# Altium PCB IO_Boardv2_301115.PcbDoc
Units mil, origin at the board's own origin, x right, y up, seen from the top; angles counter-clockwise.
Board outline 6889.76 x 3740.16 mil, 2 copper layers (Top Layer, Bottom Layer); 139 components, 104 nets, 581 pads, 46 vias.
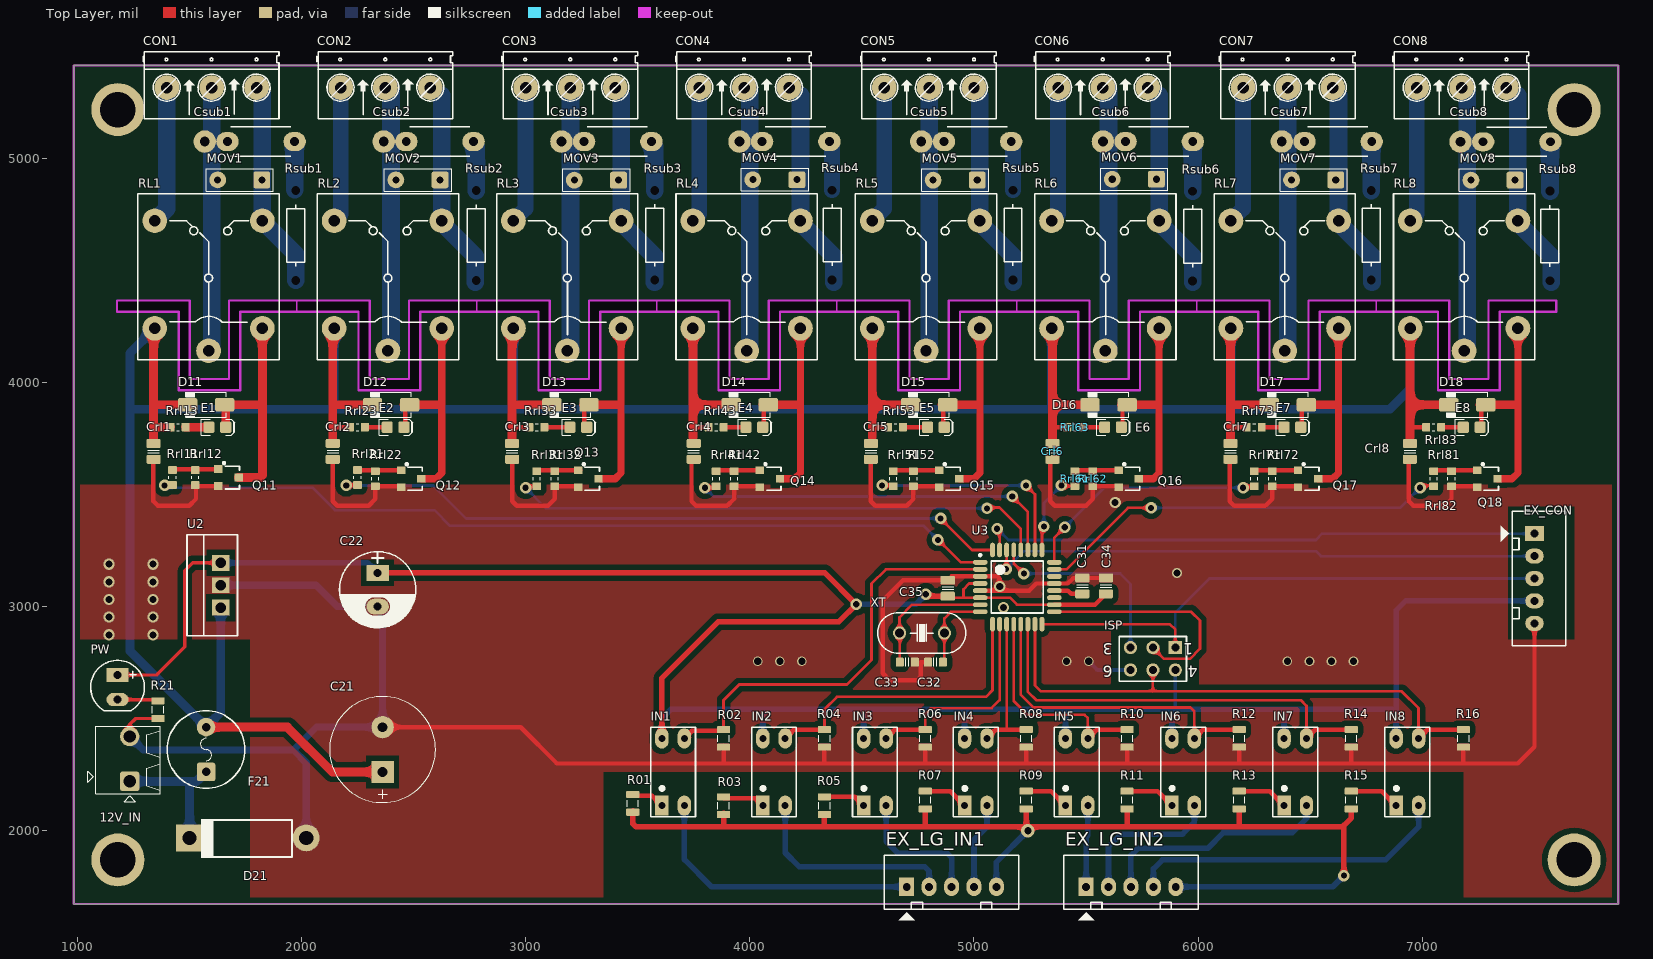
[diagram p0: Top Layer view]
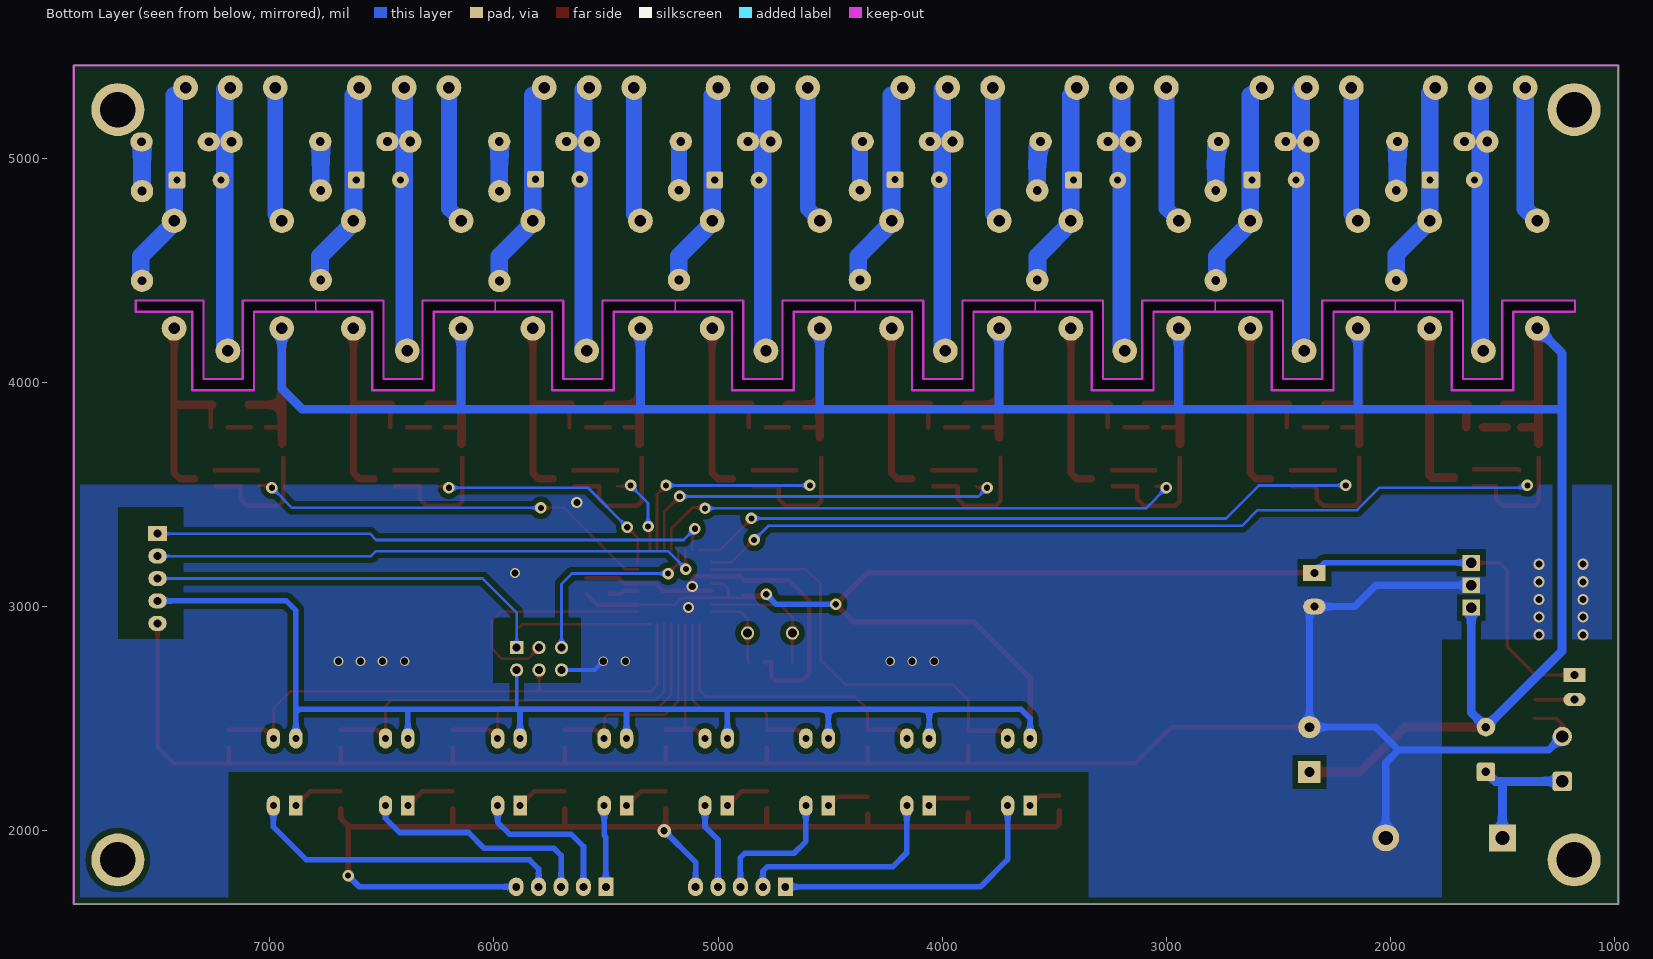
[diagram p1: Bottom Layer view, seen from below]
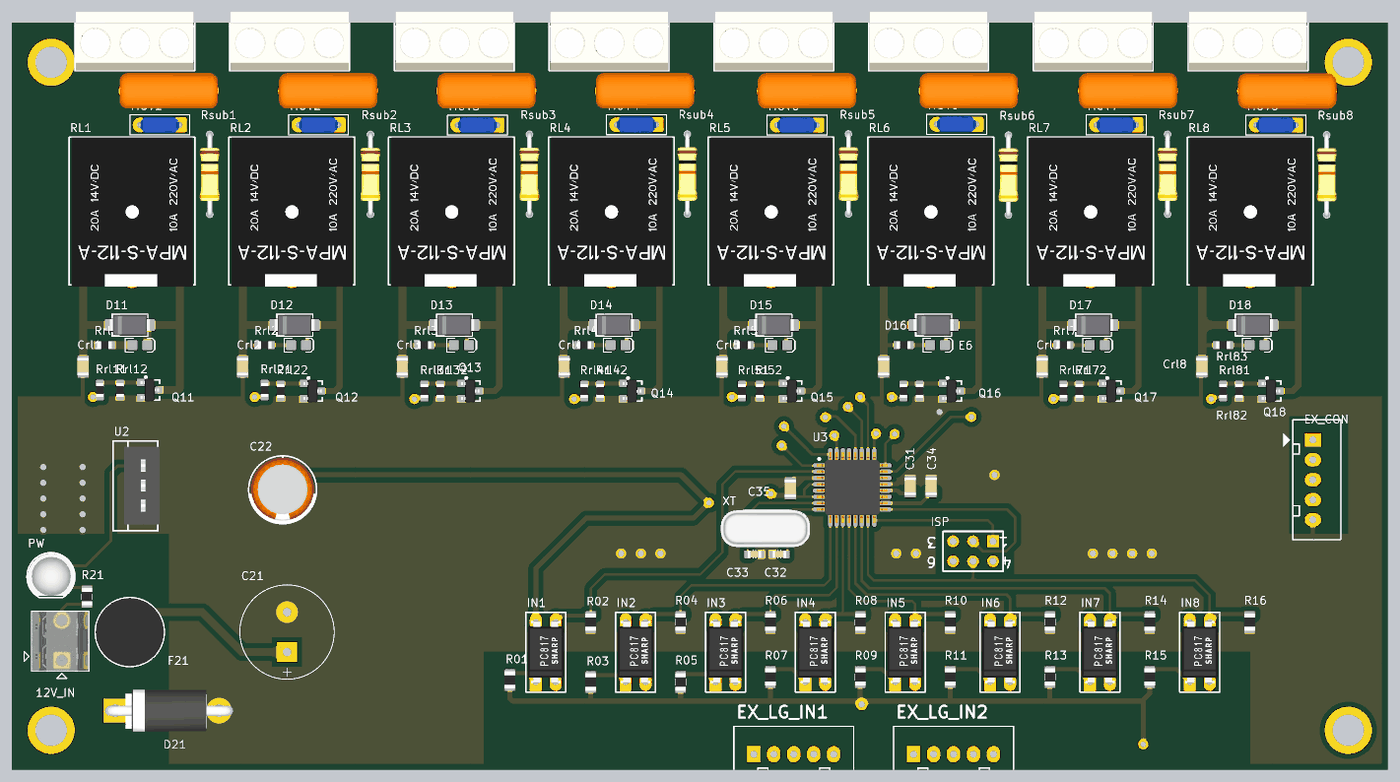
[diagram p2: 3D render of the assembled board from above, using the file's embedded part models]

## Layer stack, top to bottom
Top Solder: solder mask 0.4, Solder Resist, Dk 3.5
Top Layer: signal copper 1.4
Dielectric 1: dielectric 12.6, FR-4, Dk 4.8
Bottom Layer: signal copper 1.4
Bottom Solder: solder mask 0.4, Solder Resist, Dk 3.5

## Board outline
984.25,1673.23 7874.02,1673.23 7874.02,5413.39 984.25,5413.39
cut-out: 6795,4315 7070,4315 7070,3965 7345,3965 7345,4315 7597.5,4315 7597.5,4365 7295,4365 7295,4015 7120,4015 7120,4365 6795,4365
cut-out: 5992.5,4315 6267.5,4315 6267.5,3965 6542.5,3965 6542.5,4315 6795,4315 6795,4365 6492.5,4365 6492.5,4015 6317.5,4015 6317.5,4365 5992.5,4365
cut-out: 5190,4315 5465,4315 5465,3965 5740,3965 5740,4315 5992.5,4315 5992.5,4365 5690,4365 5690,4015 5515,4015 5515,4365 5190,4365
cut-out: 4387.5,4315 4662.5,4315 4662.5,3965 4937.5,3965 4937.5,4315 5190,4315 5190,4365 4887.5,4365 4887.5,4015 4712.5,4015 4712.5,4365 4387.5,4365
cut-out: 3585,4315 3860,4315 3860,3965 4135,3965 4135,4315 4387.5,4315 4387.5,4365 4085,4365 4085,4015 3910,4015 3910,4365 3585,4365
cut-out: 2782.5,4315 3057.5,4315 3057.5,3965 3332.5,3965 3332.5,4315 3585,4315 3585,4365 3282.5,4365 3282.5,4015 3107.5,4015 3107.5,4365 2782.5,4365
cut-out: 1980,4315 2255,4315 2255,3965 2530,3965 2530,4315 2782.5,4315 2782.5,4365 2480,4365 2480,4015 2305,4015 2305,4365 1980,4365
cut-out: 1177.5,4315 1452.5,4315 1452.5,3965 1727.5,3965 1727.5,4315 1980,4315 1980,4365 1677.5,4365 1677.5,4015 1502.5,4015 1502.5,4365 1177.5,4365

## Design rules (kind name [scope] priority, off if disabled: settings)
Clearance [All] p1: gap=25
PlaneConnect [All] p1: planeconnectstyle=Direct reliefexpansion=20 reliefentries=4 reliefconductorwidth=25 reliefairgap=10
PolygonConnect [All] p1: connectstyle=Direct reliefconductorwidth=25 reliefentries=4 polygonreliefangle="90 Angle" airgapwidth=10
RoutingVias [All] p1: holewidth=28 width=50 viastyle="Through Hole" minholewidth=23.62 minwidth=47.24 maxholewidth=196.85 maxwidth=196.85
SolderMaskExpansion [All] p1: expansion=4
Width [All] p1: maxlimit=118.11 minlimit=10 preferedwidth=10
29 further rules are at their usual default settings.

## Components (designator, comment, footprint, x,y, rotation, side; value= is the part's Value field where it differs from the comment)
12V_IN "Stackable ScrewTerm" 2P_PCB_ScrewTerm_200mil 1082.68,2165.35 r0 top
C21 "2200uF/35V" CP_1000uF_25V 2362.2,2362.2 r90 top
C22 "330uF/25V" CP1.5/3.4 2340,3150 r270 top
C31 "Cap" CAPC2012N_F 5483,3092 r90 top
C32 "CAP NP" CAPC1608N 4828,2752 r180 top
C33 "CAP NP" CAPC1608N 4703,2752 r0 top
C34 "Cap" CAPC2012N_F 5588,3092 r90 top
C35 "Cap" CAPC2012N_F 4883,3082 r90 top
CON1 "3P_ScrewTerm_200mil" 3P_ScrewTerm_200mil 1300,5175 r0 top
CON2 "3P_ScrewTerm_200mil" 3P_ScrewTerm_200mil 2075,5175 r0 top
CON3 "3P_ScrewTerm_200mil" 3P_ScrewTerm_200mil 2900,5175 r0 top
CON4 "3P_ScrewTerm_200mil" 3P_ScrewTerm_200mil 3675,5175 r0 top
CON5 "3P_ScrewTerm_200mil" 3P_ScrewTerm_200mil 4500,5175 r0 top
CON6 "3P_ScrewTerm_200mil" 3P_ScrewTerm_200mil 5275,5175 r0 top
CON7 "3P_ScrewTerm_200mil" 3P_ScrewTerm_200mil 6100,5175 r0 top
CON8 "3P_ScrewTerm_200mil" 3P_ScrewTerm_200mil 6875,5175 r0 top
Crl1 "CAP NP" CAPC2012N_F 1341,3692 r270 top
Crl2 "CAP NP" CAPC2012N_F 2140,3692 r270 top
Crl3 "CAP NP" CAPC2012N_F 2940,3692 r270 top
Crl4 "CAP NP" CAPC2012N_F 3750,3692 r270 top
Crl5 "CAP NP" CAPC2012N_F 4540,3692 r270 top
Crl6 "CAP NP" CAPC2012N_F 5350,3692 r270 top
Crl7 "CAP NP" CAPC2012N_F 6144,3692 r270 top
Crl8 "CAP NP" CAPC2012N_F 6944,3692 r270 top
Csub1 "CAP NP" CAPMF12.5x4.5x9.0x10mmLS 1820,5074 r180 top
Csub2 "CAP NP" CAPMF12.5x4.5x9.0x10mmLS 2618,5074 r180 top
Csub3 "CAP NP" CAPMF12.5x4.5x9.0x10mmLS 3411,5074 r180 top
Csub4 "CAP NP" CAPMF12.5x4.5x9.0x10mmLS 4205,5074 r180 top
Csub5 "CAP NP" CAPMF12.5x4.5x9.0x10mmLS 5016,5074 r180 top
Csub6 "CAP NP" CAPMF12.5x4.5x9.0x10mmLS 5826,5074 r180 top
Csub7 "CAP NP" CAPMF12.5x4.5x9.0x10mmLS 6624,5074 r180 top
Csub8 "CAP NP" CAPMF12.5x4.5x9.0x10mmLS 7421,5073 r180 top
D11 "Diode" DO-214AC 1575,3900 r180 top
D12 "Diode" DO-214AC 2400,3900 r180 top
D13 "Diode" DO-214AC 3200,3900 r180 top
D14 "Diode" DO-214AC 4000,3900 r180 top
D15 "Diode" DO-214AC 4800,3900 r180 top
D16 "Diode" DO-214AC 5600,3900 r180 top
D17 "Diode" DO-214AC 6400,3900 r180 top
D18 "Diode" DO-214AC 7200,3900 r180 top
D21 "Diode" "Diode 3A" 1771.65,1968.5 r180 top
E1 "Blue" LED-0805-A 1625,3800 r0 top
E2 "Blue" LED-0805-A 2420,3800 r0 top
E3 "Blue" LED-0805-A 3235,3800 r0 top
E4 "Blue" LED-0805-A 4020,3800 r0 top
E5 "Blue" LED-0805-A 4830,3800 r0 top
E6 "Blue" LED-0805-A 5620,3800 r0 top
E7 "Blue" LED-0805-A 6420,3800 r0 top
E8 "Blue" LED-0805-A 7220,3800 r0 top
EX_CON "JP5" CON5 7500,3325 r270 top
EX_LG_IN1 "JP5" CON5 4700,1750 r0 top
EX_LG_IN2 "JP5" CON5 5500,1750 r0 top
F21 "1.5A" FUSE_SR-5-BK 1574.8,2362.2 r90 top
IN1 "PC817" DIP4/W0.3 3608,2112 r0 top
IN2 "PC817" DIP4/W0.3 4058,2112 r0 top
IN3 "PC817" DIP4/W0.3 4508,2112 r0 top
IN4 "PC817" DIP4/W0.3 4958,2112 r0 top
IN5 "PC817" DIP4/W0.3 5408,2112 r0 top
IN6 "PC817" DIP4/W0.3 5883,2112 r0 top
IN7 "PC817" DIP4/W0.3 6383,2112 r0 top
IN8 "PC817" DIP4/W0.3 6883,2112 r0 top
ISP "Header 3X2A" HDR2X3_CEN 5898,2817 r180 top
MOV1 "CAP NP" CAPC500P450250X550 1725,4903 r180 top
MOV2 "CAP NP" CAPC500P450250X550 2520,4903 r180 top
MOV3 "CAP NP" CAPC500P450250X550 3316,4902 r180 top
MOV4 "CAP NP" CAPC500P450250X550 4112,4904 r180 top
MOV5 "CAP NP" CAPC500P450250X550 4916,4902 r180 top
MOV6 "CAP NP" CAPC500P450250X550 5715,4906 r180 top
MOV7 "CAP NP" CAPC500P450250X550 6515,4903 r180 top
MOV8 "CAP NP" CAPC500P450250X550 7315,4902 r180 top
PW "Led" "LED 5mm RED" 1180,2640 r270 top
Q11 "C828" "SOT23 TOP" 1675,3575 r270 top
Q12 "C828" "SOT23 TOP" 2490,3570 r270 top
Q13 "C828" "SOT23 TOP" 3280,3570 r270 top
Q14 "C828" "SOT23 TOP" 4090,3570 r270 top
Q15 "C828" "SOT23 TOP" 4890,3570 r270 top
Q16 "C828" "SOT23 TOP" 5690,3570 r270 top
Q17 "C828" "SOT23 TOP" 6490,3570 r270 top
Q18 "C828" "SOT23 TOP" 7290,3570 r270 top
R01 "Res" RESC2012N_F 3478,2122 r270 top
R02 "Res" RESC2012N_F 3883,2412 r90 top
R03 "Res" RESC2012N_F 3883,2112 r270 top
R04 "Res" RESC2012N_F 4333,2412 r90 top
R05 "Res" RESC2012N_F 4333,2112 r270 top
R06 "Res" RESC2012N_F 4783,2412 r90 top
R07 "Res" RESC2012N_F 4783,2137 r270 top
R08 "Res" RESC2012N_F 5233,2412 r90 top
R09 "Res" RESC2012N_F 5233,2137 r270 top
R10 "Res" RESC2012N_F 5683,2412 r90 top
R11 "Res" RESC2012N_F 5683,2137 r270 top
R12 "Res" RESC2012N_F 6183,2412 r90 top
R13 "Res" RESC2012N_F 6183,2137 r270 top
R14 "Res" RESC2012N_F 6683,2412 r90 top
R15 "Res" RESC2012N_F 6683,2137 r270 top
R16 "Res" RESC2012N_F 7183,2412 r90 top
R21 "Res_0805_1k" RESC2012N_F 1360,2540 r270 top
RL1 "Relay 10A/5V" RL_5PIN 1900,4100 r90 top
RL2 "Relay 10A/5V" RL_5PIN 2700,4100 r90 top
RL3 "Relay 10A/5V" RL_5PIN 3500,4100 r90 top
RL4 "Relay 10A/5V" RL_5PIN 4300,4100 r90 top
RL5 "Relay 10A/5V" RL_5PIN 5100,4100 r90 top
RL6 "Relay 10A/5V" RL_5PIN 5900,4100 r90 top
RL7 "Relay 10A/5V" RL_5PIN 6700,4100 r90 top
RL8 "Relay 10A/5V" RL_5PIN 7500,4100 r90 top
Rl52 "Res" RESC1608N_ZERO 4730,3570 r90 top
Rrl11 "Res" RESC1608N_ZERO 1425,3575 r90 top
Rrl12 "Res" RESC1608N_ZERO 1526.38,3575 r90 top
Rrl13 "Res" RESC1608N_ZERO 1450,3800 r180 top
Rrl21 "Res" RESC1608N_ZERO 2250,3575 r90 top
Rrl22 "Res" RESC1608N_ZERO 2330,3570 r90 top
Rrl23 "Res" RESC1608N_ZERO 2250,3800 r180 top
Rrl31 "Res" RESC1608N_ZERO 3050,3570 r90 top
Rrl32 "Res" RESC1608N_ZERO 3130,3570 r90 top
Rrl33 "Res" RESC1608N_ZERO 3050,3800 r180 top
Rrl41 "Res" RESC1608N_ZERO 3850,3570 r90 top
Rrl42 "Res" RESC1608N_ZERO 3930,3570 r90 top
Rrl43 "Res" RESC1608N_ZERO 3850,3800 r180 top
Rrl51 "Res" RESC1608N_ZERO 4640,3570 r90 top
Rrl53 "Res" RESC1608N_ZERO 4650,3800 r180 top
Rrl61 "Res" RESC1608N_ZERO 5450,3570 r90 top
Rrl62 "Res" RESC1608N_ZERO 5530,3570 r90 top
Rrl63 "Res" RESC1608N_ZERO 5450,3800 r180 top
Rrl71 "Res" RESC1608N_ZERO 6250,3570 r90 top
Rrl72 "Res" RESC1608N_ZERO 6330,3570 r90 top
Rrl73 "Res" RESC1608N_ZERO 6250,3800 r180 top
Rrl81 "Res" RESC1608N_ZERO 7050,3570 r90 top
Rrl82 "Res" RESC1608N_ZERO 7130,3570 r90 top
Rrl83 "Res" RESC1608N_ZERO 7050,3800 r180 top
Rsub1 "Res" RESTH_AXIAL-0.4 1975,4655 r270 top
Rsub2 "Res" RESTH_AXIAL-0.4 2780,4655 r270 top
Rsub3 "Res" RESTH_AXIAL-0.4 3576,4656 r270 top
Rsub4 "Res" RESTH_AXIAL-0.4 4367,4657 r270 top
Rsub5 "Res" RESTH_AXIAL-0.4 5174,4657 r270 top
Rsub6 "Res" RESTH_AXIAL-0.4 5975,4652 r270 top
Rsub7 "Res" RESTH_AXIAL-0.4 6772,4656 r270 top
Rsub8 "Res" RESTH_AXIAL-0.4 7569,4653 r270 top
U2 "LM7805" TO-220 1640,3095 r90 top
U3 "ATmega88PA" 32PIN 5193,3087 r0 top
XT "20MHz" XT2 4768,2882 r0 top

## Footprints (in the part's own frame and the unit in brackets; to place one, negate y for a bottom-side part, rotate by r counter-clockwise, add the part's x,y. Pads: shape width x height; smd on the part's side, far side on the other; paste and mask are expansions set on the pad)
2P_PCB_ScrewTerm_200mil [mm]
  rrect25% 2.2x2.2 hole 1.4: 1(3.85,1.397)
  round 2.2 hole 1.4: 2(3.85,6.477)
  silkscreen extent -0.93,-0.89 7.3,7.66, body extent 0,0 7.3,7.62, height 8.5
3P_ScrewTerm_200mil [mil]
  round 110 hole 51.18: 1(100,140) 2(300,140) 3(500,140)
  silkscreen extent -6,0 600,300, body extent 5,0 595,295, height 394
32PIN [mm]
  oval 1.65x0.55 smd: 1(-4.2,2.8) 2(-4.2,2) 3(-4.2,1.2) 4(-4.2,0.4) 5(-4.2,-0.4) 6(-4.2,-1.2) 7(-4.2,-2) 8(-4.2,-2.8) 17(4.2,-2.8) 18(4.2,-2) 19(4.2,-1.2) 20(4.2,-0.4) 21(4.2,0.4) 22(4.2,1.2) 23(4.2,2) 24(4.2,2.8)
  oval 0.55x1.65 smd: 9(-2.8,-4.2) 10(-2,-4.2) 11(-1.2,-4.2) 12(-0.4,-4.2) 13(0.4,-4.2) 14(1.2,-4.2) 15(2,-4.2) 16(2.8,-4.2) 25(2.8,4.2) 26(2,4.2) 27(1.2,4.2) 28(0.4,4.2) 29(-0.4,4.2) 30(-1.2,4.2) 31(-2,4.2) 32(-2.8,4.2)
  silkscreen extent -4.32,-2.95 2.95,3.75, body extent -4.5,-4.5 4.5,4.5, height 1.6
CAPC500P450250X550 [mm] "TDK FK24 radial ceramic capacitor"
  round 0.508 on Mech14: 0(0,0)
  rrect25% 1.905x1.905 hole 0.8: 1(-2.5,0)
  round 1.905 hole 0.8: 2(2.5,0)
  silkscreen extent -3.81,-1.27 3.81,1.27, body extent -2.8,-1 2.8,1, height 5.47
CAPC1608N [mm] "Chip Capacitor, Body 1.6x0.8mm, 0603, IPC Medium Density"
  round 0.254 on Mech14: 0(0,0)
  rrect25% 0.9x1 smd: 1(-0.85,0) 2(0.85,0)
  Top Layer pour cut-out: -0.4,0.6 0.4,0.6 0.4,-0.6 -0.4,-0.6
  silkscreen extent -0.18,-0.48 0.18,0.48, body extent -0.85,-0.45 0.85,0.45, height 0.89
CAPC2012N_F [mm] "Chip Capacitor, Body 2.0x1.2mm, 0805, IPC Medium Density, for Flex circuits"
  round 0.254 on Mech14: 0(0,0)
  rrect25% 1.2x1.4 on Top Solder: 1(-0.9,0) 1(0.9,0)
  rrect25% 1x1.6 smd paste-1: 1(-0.9,0) 2(0.9,0)
  rrect25% 1x1.4 on Top Paste: 1(-0.9,0) 1(0.9,0)
  Top Layer pour cut-out: -0.4,0.8 0.4,0.8 0.4,-0.8 -0.4,-0.8
  silkscreen extent -0.15,-0.65 0.15,0.65, body extent -1.1,-0.72 1.1,0.73, height 1.34
CAPMF12.5x4.5x9.0x10mmLS [mil] "Capacitor, MF, Thru-Hole, Dipped Radial; Body 12.5 x 4.5 x 9.0 mm (WxTxH) Pin Spacing 10.0 mm (typ)"
  oval 100x85 hole 39.37: 1(-150,0) 2(150,0)
  round 100 hole 43.31: 2(251,0)
  silkscreen extent -133,-65 135,65, body extent -196,-89 296,89, height 354
CON5 [mm] "CON5"
  rect 1.7x2.1 hole 0.9: 1(0,0)
  oval 1.7x2.1 hole 0.9: 2(2.54,0) 3(5.08,0) 4(7.62,0) 5(10.16,0)
  silkscreen extent -2.54,-3.8 12.7,3.56
CP1.5/3.4 [mil] "Tu hoa 220->470uF,16V, 470uF/16V,25V"
  rect 70x100 hole 35.43: 1(0,0)
  oval 70x100 hole 35.43: 2(150,0)
  silkscreen extent -95,-170 245,170, body extent -85,-157 230,157, height 446
CP_1000uF_25V [mm]
  rect 2.54x2.54 hole 1.1: 1(-2.54,0)
  round 2.54 hole 1.1: 2(2.54,0)
  silkscreen extent -6,-6 6,6, body extent -6,-6 6.02,6, height 20.1
"Diode 3A" [mil] "Diode Schottky 1N5822"
  round 120 hole 62.99: 1(-250,0)
  rect 120x120 hole 62.99: 2(270,0)
  silkscreen extent -186,-85 219,90, body extent -321,-104 321,104, height 248
DIP4/W0.3 [mil] "PC817"
  rect 60x90 hole 31.5: 1(0,0)
  oval 60x90 hole 31.5: 2(100,0) 3(100,300) 4(0,300)
  silkscreen extent -50,-50 150,350, body extent -40,-5 140,305, height 169
DO-214AC [mm] "JEDEC DO214 variation AC. SMA"
  round 0.508 on Mech14: 0(0,0)
  rrect25% 2.2x1.5 smd: A(-2.1,0) K(2.1,0)
  silkscreen extent -2.3,-1.4 2.3,1.4, body extent -2.6,-1.3 2.6,1.3, height 2.42
FUSE_SR-5-BK [mm]
  round 0.5 on Mech14: 0(0,0)
  rrect25% 2.1x2.1 hole 0.965: 1(-2.54,0)
  round 2.1 hole 0.965: 2(2.54,0)
  silkscreen extent -4.4,-4.4 4.4,4.4, body extent -4.35,-4.32 4.35,4.32, height 8.29
HDR2X3_CEN [mm] "Connector; Header; 3x2 Position"
  rect 1.5x1.5 hole 0.9: 1(0,0)
  round 1.5 hole 0.9: 2(2.54,0) 3(5.08,0) 4(0,2.54) 5(2.54,2.54) 6(5.08,2.54)
  silkscreen extent -1.27,-1.27 6.35,3.81
"LED 5mm RED" [mm]
  rect 1.6x2.5 hole 0.9: A(-1.397,0)
  oval 1.5x2.5 hole 0.9: K(1.397,0)
  silkscreen extent -3.04,-3.05 2.64,3.04, body extent -2.94,-2.97 2.48,3.05, height 12.31
LED-0805-A [mil]
  round 20 on Mech14: 0(0,0)
  rrect25% 50x50 smd: A(-37.5,0) K(37.5,0)
  Top Layer pour cut-out: -15,30 15,30 15,-30 -15,-30
  silkscreen extent -72,-35 77,35, body extent -39,-25 39,25, height 31
RESC1608N_ZERO [mm] "Chip Resistor, Body 1.6x0.8mm, 0603, IPC Medium Density"
  round 0.254 on Mech14: 0(0,0)
  rrect25% 0.9x1 smd: 1(-0.85,0) 2(0.85,0)
  Top Layer pour cut-out: -0.4,0.6 0.4,0.6 0.4,-0.6 -0.4,-0.6
  silkscreen extent -0.15,-0.41 0.15,0.41, body extent -0.87,-0.47 0.88,0.48, height 0.54
RESC2012N_F [mm] "Chip Resistor, Body 2.0x1.2mm, 0805, IPC Medium Density"
  round 0.254 on Mech14: 0(0,0)
  rrect25% 1x1.3 on Top Solder: 1(-1,0) 1(1,0)
  rrect25% 0.8x1.5 smd paste-1: 1(-1,0) 2(1,0)
  rrect25% 0.8x1.3 on Top Paste: 1(-1,0) 1(1,0)
  Top Layer pour cut-out: -0.6,0.75 0.6,0.75 0.6,-0.75 -0.6,-0.75
  silkscreen extent -0.38,-0.64 0.38,0.64, body extent -1.1,-0.67 1.1,0.68, height 0.69
RESTH_AXIAL-0.4 [mm]
  round 0 / inner round 0 / far side round 2.54 hole 1 unplated: 1(-5.08,0) 2(5.08,0)
  silkscreen extent -3.5,-1.02 3.5,1.02, body extent -5.38,-1.28 5.38,1.28, height 2.6
RL_5PIN [mm]
  round 2.8 hole 1.3: 1(1.041,7.976) 2(15.773,14.072) 3(15.773,1.88) 4(3.581,1.88) 5(3.581,14.072)
  silkscreen extent 0.03,-0.03 18.82,15.98, body extent -0.18,0.2 18.82,15.7, height 15.5
"SOT23 TOP" [mm]
  rect 0.9x0.95 smd: 1(-0.965,-1.143) 2(0,1.143) 3(0.965,-1.143)
  silkscreen extent -1.77,-0.63 1.3,1.25, body extent -1.46,-1.17 1.46,1.17, height 1
TO-220 [mm]
  rect 1.8x2 hole 1.2: 1(-2.54,0) 2(0,0) 3(2.54,0)
  silkscreen extent -5.71,-1.91 5.71,3.81, body extent -4.92,-2.13 4.98,2.37, height 8.08
XT2 [mm]
  round 1.5 hole 1: 1(-2.54,0) 2(2.54,0)
  silkscreen extent -5.03,-2.29 4.96,2.29, body extent -5.93,-2.36 5.42,2.29, height 3.5

## Part data
12V_IN: library part 2P_ScrewTerm_90S_3.81MM, "Terminal Block Screw Type THT 2-Position 3.81mm pitch"
C21 C22: library part CP4, "Cap 1000uF/16V - 220uF/50V"
E1 E2 E3 E4 E5 E6 E7 E8: library part LED_SMD_Blue_0805_100mcd, "LED 0805 SMD Blue 100mcd 470nm"
EX_CON EX_LG_IN1 EX_LG_IN2: library part Con5, "Connector 5"
F21: library part Fuse
IN1 IN2 IN3 IN4 IN5 IN6 IN7 IN8: library part Opto
ISP: "Header, 3-Pin, Dual row"
Q11 Q12 Q13 Q14 Q15 Q16 Q17 Q18: library part NPN, "Transistor C828 C1815...."
R21: library part Res
RL1 RL2 RL3 RL4 RL5 RL6 RL7 RL8: library part "Relay 1", "Relay SPDT,10A - 12VDC 5 Pin"
U2: library part LM78xx
U3: library part ATmega48/168/328, "ATmega48/168/328"
XT: library part Crystal

## Free pads (board coordinates)
  round 236.22 hole 157.48: 0(7677.17,5216.54) 1(7677.17,1870.08) 2(1181.1,5216.54) 3(1181.1,1870.08)

## Via types
v1: diameter 51.18, hole 27.56, Top Layer to Bottom Layer, 22 vias
v2: diameter 50, hole 31.5, Top Layer to Bottom Layer, tented both sides, 13 vias
v3: diameter 43.31, hole 31.5, Top Layer to Bottom Layer, 10 vias
v4: diameter 59.06, hole 31.5, Top Layer to Bottom Layer, 1 vias

## Nets (pads, with @x,y where several pads share a name; then routed paths per layer and width w, separated by ;. In a path a pad name is that pad's centre, name@x,y a point inside that pad or via, vN(x,y) a via of type N, cw(c..) or ccw(c..) an arc to the next point about the centre after c; other vN are vias at no path point)
+12_EX: EX_LG_IN1.5 EX_LG_IN2.5 R01.2 R03.2 R05.2 R07.2 R09.2 R11.2 R13.2 R15.2 | length 5053.3
  Top Layer w25: R01.2@3478,2088.54 3478,2032 3492.96,2017.04 4338,2017.04 ; 3883,2022.04 R03.2@3883,2078.54 ; R05.2 4333,2022.04 4338,2017.04 ; R07.2 4783,2022.04 4788,2017.04 ; v4@5228,2017.04 4788,2017.04 ; v4@5233,2022.04 R09.2 ; v4@5240,2017.04 5678,2017.04 ; R11.2 5683,2022.04 5678,2017.04 ; R13.2 6183,2022.04 6188,2017.04 ; v1(6650,1800) 6650,2024 ; R15.2 6683,2057 6650,2024 ; 4338,2017.04 4788,2017.04 ; 5678,2017.04 6188,2017.04 ; 6188,2017.04 6643.04,2017.04 6650,2024
  Bottom Layer w25: EX_LG_IN1.5 5100,1860 v4(5240,2000) ; EX_LG_IN2.5 6600,1750 v1(6650,1800)
+12V: C21.1 Crl1.1@1341,3727.43 Crl2.1@2140,3727.43 Crl3.1@2940,3727.43 Crl4.1@3750,3727.43 Crl5.1@4540,3727.43 Crl6.1@5350,3727.43 Crl7.1@6144,3727.43 Crl8.1@6944,3727.43 D11.K D12.K D13.K D14.K D15.K D16.K D17.K D18.K F21.2 RL1.5 RL2.5 RL3.5 RL4.5 RL5.5 RL6.5 RL7.5 RL8.5 Rrl13.2 Rrl23.2 Rrl33.2 Rrl43.2 Rrl53.2 Rrl63.2 Rrl73.2 Rrl83.2 U2.1 | length 17851.6
  Top Layer w19.68: 2146,3800 Rrl23.2 ; 2946,3800 Rrl33.2 ; 3746,3800 Rrl43.2 ; 4546,3800 Rrl53.2 ; 5350,3800 Rrl63.2 ; 6146,3800 Rrl73.2 ; 6946,3800 Rrl83.2
  Top Layer w39.37: Crl1.1@1341,3727.43 1341,4236 RL1.5 ; 1346,3800 Rrl13.2 ; 1346,3900 D11.K ; F21.2 1937.8,2462.2 2137.8,2262.2 C21.1 ; Crl2.1@2140,3727.43 2140,4235 RL2.5 ; 2146,3900 D12.K@2292.32,3900 ; Crl3.1@2940,3727.43 2940,4235 RL3.5 ; 2946,3900 D13.K@3092.32,3900 ; 3746,3756 3746,3800 3746,3900 ; RL4.5 3746,3900 ; D14.K@3892.32,3900 3746,3900 ; 4546,3756 4546,3800 4546,3900 ; RL5.5 4546,3900 ; D15.K@4692.32,3900 4546,3900 ; RL6.5 5350,4237 5350,3900 ; Crl6.1@5350,3727.43 5350,3800 5350,3900 ; D16.K@5492.32,3900 5350,3900 ; Crl7.1@6144,3727.43 6144,4239 RL7.5 ; 6146,3900 D17.K@6292.32,3900 ; Crl8.1@6944,3727.43 RL8.5@6944,4239 ; 6946,3756 6946,3800 6946,3900 ; RL8.5 6946,3900 ; D18.K@7092.32,3900 6946,3900
  Bottom Layer w39.37: RL1.5 1235,4130 1235,3880 ; U2.1 1640,2527.4 F21.2 1235,2802.01 1235,3880 ; RL2.5 2146,3884 2150,3880 ; RL3.5 2946,3881 2945,3880 ; RL4.5 3746,3884 3750,3880 ; RL5.5 4546,3881 4545,3880 ; RL6.5 5346,3881 5347,3880 ; 6146,3884 RL7.5 ; RL8.5 6946,3971 6855,3880 5347,3880 ; 1235,3880 2150,3880 ; 2150,3880 2945,3880 ; 2945,3880 3750,3880 ; 3750,3880 4545,3880 ; 4545,3880 5347,3880
ADC6: U3.19
ADC7: U3.22
AREF: C31.1@5483,3056.57 U3.20 | length 130.7
  Top Layer w19.68: U3.20 5418.75,3071.25 5433.43,3056.57 C31.1@5483,3056.57
EX_IN_1: EX_LG_IN1.1 IN1.2 | length 1282.5
  Bottom Layer w25: IN1.2 3708,1872 3830,1750 EX_LG_IN1.1
EX_IN_2: EX_LG_IN1.2 IN2.2 | length 956
  Bottom Layer w25: IN2.2 4158,1902 4220,1840 4780,1840 4800,1820 EX_LG_IN1.2
EX_IN_3: EX_LG_IN1.3 IN3.2 | length 611.8
  Bottom Layer w25: IN3.2 4608,1952 4660,1900 4880,1900 4900,1880 EX_LG_IN1.3
EX_IN_4: EX_LG_IN1.4 IN4.2 | length 386
  Bottom Layer w25: EX_LG_IN1.4 5000,1960 5058,2018 IN4.2
EX_IN_5: EX_LG_IN2.1 IN5.2 | length 365.3
  Bottom Layer w25: EX_LG_IN2.1 5500,1972 5508,1980 IN5.2
EX_IN_6: EX_LG_IN2.2 IN6.2 | length 681.7
  Bottom Layer w25: EX_LG_IN2.2 5600,1930 5655,1985 5930,1985 5983,2038 IN6.2
EX_IN_7: EX_LG_IN2.3 IN7.2 | length 1048.3
  Bottom Layer w25: EX_LG_IN2.3 5700,1890 5732.04,1922.04 6043.04,1922.04 6113,1992 6420,1992 6483,2055 IN7.2
EX_IN_8: EX_LG_IN2.4 IN8.2 | length 1435.5
  Bottom Layer w25: EX_LG_IN2.4 5800,1830 5840,1870 6836,1870 6983,2017 IN8.2
GND: 12V_IN.2 C21.2 C22.2 C31.2 C32.2 C33.2 C34.2 C35.2 Crl1.2 Crl2.2 Crl3.2 Crl4.2 Crl5.2 Crl6.2 Crl7.2 Crl8.2 D21.1 EX_CON.5 ISP.6 Q11.3 Q12.3 Q13.3 Q14.3 Q15.3 Q16.3 Q17.3 Q18.3 R02.1@3883,2372.63 R04.1@4333,2372.63 R06.1@4783,2372.63 R08.1@5233,2372.63 R10.1@5683,2372.63 R12.1@6183,2372.63 R14.1@6683,2372.63 R16.1@7183,2372.63 R21.2 Rl52.1 Rrl12.1 Rrl22.1 Rrl32.1 Rrl42.1 Rrl62.1 Rrl72.1 Rrl82.1 U2.2 U3.3 U3.5 U3.21 | length 16046.1
  Top Layer w15: 12V_IN.2 1234.25,2474.25 1260.63,2500.63 R21.2
  Top Layer w19.68: Crl1.2@1340,3664.57 1340,3470 1360,3450 1500,3450 1530,3480 1530,3536.09 1530.91,3537 Q11.3 ; Crl2.2@2140,3664.57 2140,3470 2160,3450 2300,3450 2330,3480 Rrl22.1 Q12.3@2440.46,3536.54 ; Crl3.2@2940,3664.57 2940,3470 2960,3450 3100,3450 3130,3480 Rrl32.1 Q13.3@3240.46,3536.54 ; 3140,2300 4335,2300 ; Crl4.2@3740,3664.57 3740,3470 3760,3450 3900,3450 3930,3480 Rrl42.1 Q14.3@4040.46,3536.54 ; 3883,2308 R02.1@3883,2378.54 ; R04.1@4333,2372.63 4333,2302 4335,2300 ; Crl5.2@4540,3664.57 4540,3470 4560,3450 4700,3450 4730,3480 Rl52.1 Q15.3@4840.46,3536.54 ; R06.1@4783,2372.63 4783,2302 4785,2300 ; C32.2 4763,2752 4763,2687 4748,2672 4623,2672 4593,2702 4593,3027 4683.43,3117.43 C35.2 4899.81,3134.24 U3.3 5105.76,3134.24 5113,3127 v2@5113,3071.25 ; U3.5 v2@5113,3071.25 ; R08.1@5233,2372.63 5233,2303 5230,2300 ; Crl6.2@5340,3664.57 5340,3470 5360,3450 5500,3450 5530,3480 Rrl62.1 Q16.3@5640.46,3536.54 ; C34.2 C31.2 5443.43,3127.43 5418.75,3102.75 U3.21 5277.75,3102.75 5246.25,3071.25 v2@5113,3071.25 ; R10.1@5683,2372.63 5683,2303 5680,2300 ; Crl7.2@6140,3664.57 6140,3470 6160,3450 6300,3450 6330,3480 Rrl72.1 Q17.3@6440.46,3536.54 ; R12.1@6183,2372.63 6183,2307 6190,2300 ; R14.1@6683,2372.63 6683,2307 6690,2300 ; Crl8.2@6940,3664.57 6940,3470 6960,3450 7100,3450 7130,3480 Rrl82.1 Q18.3@7240.46,3536.54 ; 7183,2303 R16.1@7183,2372.63 ; EX_CON.5 7500,2375 7425,2300 6690,2300 ; 4335,2300 4785,2300 ; 4785,2300 5230,2300 ; 5230,2300 5680,2300 ; 5680,2300 6190,2300 ; 6190,2300 6690,2300
  Top Layer w20: C21.2 2977.8,2462.2 3140,2300
  Bottom Layer w20: v3(5511.81,2755.91) 5550.72,2717 ISP.6
  Bottom Layer w31.5: 12V_IN.2 1294.61,2360 1965,2360 ; U2.2 2065,3095 2160,3000 C22.2 2362.2,2977.8 C21.2 2067.2,2462.2 1965,2360 ; D21.1 2021.65,2303.35 1965,2360
  other v2: 1141.73,2874.02 1338.58,2874.02 1141.73,2952.76 1338.58,2952.76 5131,2996 1141.73,3031.5 1338.58,3031.5 5115,3089 1141.73,3110.24 1338.58,3110.24 1141.73,3188.98 1338.58,3188.98 5629.92,3464.57
  other v3: 4035.43,2755.91 4133.86,2755.91 4232.28,2755.91 5413.39,2755.91 6397.64,2755.91 6496.06,2755.91 6594.49,2755.91 6692.91,2755.91 5905.51,3149.61
LG_IN_1: IN1.3 R02.2 U3.2 | length 1911
  Top Layer w12: R02.2@3883,2445.46 3883,2582 3953,2652 4433,2652 4543,2762 4543,3102 4606.74,3165.74 U3.2
  Top Layer w19.68: IN1.3 3741.46,2445.46 R02.2@3883,2445.46
LG_IN_2: IN2.3 R04.2 U3.9 | length 1361.7
  Top Layer w12: R04.2 4333,2542 4388,2597 5053,2597 5082.76,2626.76 U3.9
  Top Layer w19.68: IN2.3 4197.37,2451.37 R04.2
LG_IN_3: IN3.3 R06.2 U3.10 | length 957
  Top Layer w12: R06.2 4783,2522 4808,2547 5078,2547 5114.26,2583.26 U3.10
  Top Layer w19.68: IN3.3 4647.37,2451.37 R06.2
LG_IN_4: IN4.3 R08.2 U3.11 | length 662.5
  Top Layer w12: U3.11 5145.76,2453.61 5148,2451.37
  Top Layer w19.68: IN4.3 5097.37,2451.37 5148,2451.37 R08.2
LG_IN_5: IN5.3 R10.2 U3.12 | length 987.3
  Top Layer w12: U3.12 5177.25,2577.75 5238,2517 5493,2517 5508,2502 IN5.3
  Top Layer w19.68: IN5.3 5547.37,2451.37 R10.2
LG_IN_6: IN6.3 R12.2 U3.13 | length 1456.7
  Top Layer w12: U3.13 5208.75,2606.25 5265,2550 5965,2550 5983,2532 IN6.3
  Top Layer w19.68: IN6.3 6022.37,2451.37 R12.2
LG_IN_7: IN7.3 R14.2 U3.14 | length 1931.9
  Top Layer w12: U3.14 5240.24,2619.76 5278,2582 6458,2582 6483,2557 IN7.3
  Top Layer w19.68: IN7.3 6522.37,2451.37 R14.2
LG_IN_8: IN8.3 ISP.5 R16.2 U3.15 | length 2472.9
  Top Layer w12: U3.15 5271.74,2648.26 5298,2622 5798,2622 ; ISP.5 5798,2622 ; IN8.3 6983,2547 6908,2622 5798,2622
  Top Layer w19.68: IN8.3 7022.37,2451.37 R16.2
MCU_RX: EX_CON.2 U3.30 | length 2485.7
  Top Layer w12: v1(5143,3167) 5145.76,3169.76 U3.30
  Bottom Layer w12: v1(5143,3167) 5223,3247 6525,3247 6547,3225 EX_CON.2
MCU_TX: EX_CON.1 U3.31 | length 2528.6
  Top Layer w12: v1(5103,3347) 5114.26,3335.74 U3.31
  Bottom Layer w12: v1(5103,3347) 5153,3297 6525,3297 6553,3325 EX_CON.1
MISO: EX_CON.3 ISP.1 U3.16 | length 2505.7
  Top Layer w12: U3.16 5873,2921.65 5898,2896.65 ISP.1
  Bottom Layer w12: ISP.1 5898,2973 6050,3125 EX_CON.3
Net12V_IN_1: 12V_IN.1 D21.2 F21.1 | length 610.4
  Bottom Layer w39.37: 12V_IN.1 1500,2220.35 ; D21.2 1501.65,2218.7 1500,2220.35 ; F21.1 1532.95,2220.35 1500,2220.35
NetCON1_1: CON1.1 RL1.2 | length 616.4
  Bottom Layer w78.74: RL1.2 1400,4775 CON1.1
NetCON1_2: CON1.2 Csub1.2 MOV1.2 RL1.1 | length 1179.8
  Bottom Layer w78.74: RL1.1 1600,4155 CON1.2
NetCON1_3: CON1.3 MOV1.1 RL1.3 Rsub1.2 | length 932.5
  Bottom Layer w78.74: CON1.3 1826,5289 RL1.3 1975,4572 Rsub1.2
NetCON2_1: CON2.1 RL2.2 | length 615
  Bottom Layer w70: RL2.2 2175,4750 CON2.1
  Bottom Layer w78.74: RL2.2@2146,4712 RL2.2
NetCON2_2: CON2.2 Csub2.2 MOV2.2 RL2.1 | length 1160
  Bottom Layer w78.74: RL2.1@2400,4146 CON2.2@2400,5306
NetCON2_3: CON2.3 MOV2.1 RL2.3 Rsub2.2 | length 895.7
  Bottom Layer w78.74: 2626,5280 2626,4712 2775,4563 Rsub2.2@2775,4446
NetCON3_1: CON3.1 RL3.2 | length 625.4
  Bottom Layer w70: RL3.2 3000,4775 CON3.1
  Bottom Layer w78.74: RL3.2@2946,4712 RL3.2
NetCON3_2: CON3.2 Csub3.2 MOV3.2 RL3.1 | length 1160
  Bottom Layer w78.74: RL3.1@3200,4146 CON3.2@3200,5306
NetCON3_3: CON3.3 MOV3.1 RL3.3 Rsub3.2 | length 895.7
  Bottom Layer w78.74: CON3.3@3426,5280 3426,4712 3575,4563 Rsub3.2@3575,4446
NetCON4_1: CON4.1 RL4.2 | length 615
  Bottom Layer w70: RL4.2 3775,4750 CON4.1
  Bottom Layer w78.74: RL4.2@3746,4712 RL4.2
NetCON4_2: CON4.2 Csub4.2 MOV4.2 RL4.1 | length 1160
  Bottom Layer w78.74: RL4.1@4000,4146 CON4.2@4000,5306
NetCON4_3: CON4.3 MOV4.1 RL4.3 Rsub4.2 | length 895.7
  Bottom Layer w78.74: 4226,5280 4226,4712 4375,4563 Rsub4.2@4375,4446
NetCON5_1: CON5.1 RL5.2 | length 616.4
  Bottom Layer w70: RL5.2 4600,4775 CON5.1
NetCON5_2: CON5.2 Csub5.2 MOV5.2 RL5.1 | length 1160
  Bottom Layer w78.74: RL5.1@4800,4146 CON5.2@4800,5306
NetCON5_3: CON5.3 MOV5.1 RL5.3 Rsub5.2 | length 895.7
  Bottom Layer w78.74: CON5.3@5026,5280 5026,4712 5175,4563 Rsub5.2@5175,4446
NetCON6_1: CON6.1 RL6.2 | length 615
  Bottom Layer w70: RL6.2 5375,4750 CON6.1
  Bottom Layer w78.74: RL6.2@5346,4712 RL6.2
NetCON6_2: CON6.2 Csub6.2 MOV6.2 RL6.1 | length 1160
  Bottom Layer w78.74: RL6.1@5600,4146 CON6.2@5600,5306
NetCON6_3: CON6.3 MOV6.1 RL6.3 Rsub6.2 | length 895.7
  Bottom Layer w78.74: 5826,5280 5826,4712 5975,4563 Rsub6.2@5975,4446
NetCON7_1: CON7.1 RL7.2 | length 616.4
  Bottom Layer w70: RL7.2 6200,4775 CON7.1
NetCON7_2: CON7.2 Csub7.2 MOV7.2 RL7.1 | length 1160
  Bottom Layer w78.74: RL7.1@6400,4146 CON7.2@6400,5306
NetCON7_3: CON7.3 MOV7.1 RL7.3 Rsub7.2 | length 895.7
  Bottom Layer w78.74: CON7.3@6626,5280 6626,4712 6775,4563 Rsub7.2@6775,4446
NetCON8_1: CON8.1 RL8.2 | length 615
  Bottom Layer w70: RL8.2 6975,4750 CON8.1
  Bottom Layer w78.74: RL8.2@6946,4712 RL8.2
NetCON8_2: CON8.2 Csub8.2 MOV8.2 RL8.1 | length 1160
  Bottom Layer w78.74: RL8.1@7200,4146 CON8.2@7200,5306
NetCON8_3: CON8.3 MOV8.1 RL8.3 Rsub8.2 | length 895.7
  Bottom Layer w78.74: 7426,5280 7426,4712 7575,4563 Rsub8.2@7575,4446
NetCsub1_1: Csub1.1 Rsub1.1 | length 210
  Bottom Layer w78.74: Rsub1.1@1970,4860 Csub1.1@1970,5070
NetCsub2_1: Csub2.1 Rsub2.1 | length 208
  Bottom Layer w78.74: Csub2.1@2768,5058 2780,5046 Rsub2.1
NetCsub3_1: Csub3.1 Rsub3.1 | length 217.2
  Bottom Layer w78.74: Csub3.1@3561,5067 3576,5052 Rsub3.1
NetCsub4_1: Csub4.1 Rsub4.1 | length 205
  Bottom Layer w70: Rsub4.1 Csub4.1@4367,5062
NetCsub5_1: Csub5.1 Rsub5.1 | length 222.4
  Bottom Layer w70: Csub5.1 5169.48,5074 5174,5069.48 Rsub5.1
NetCsub6_1: Csub6.1 Rsub6.1 | length 216.4
  Bottom Layer w78.74: Rsub6.1 5975,5067 Csub6.1@5976,5068
NetCsub7_1: Csub7.1 Rsub7.1 | length 218.8
  Bottom Layer w78.74: Rsub7.1 6772,5072 Csub7.1
NetCsub8_1: Csub8.1 Rsub8.1 | length 208
  Bottom Layer w78.74: Rsub8.1 Csub8.1@7569,5061
NetD11_1: D11.A E1.K Q11.2 RL1.4 | length 1019.1
  Top Layer w39.37: D11.A 1816,3900 ; E1.K D11.A@1662.5,3895.18 ; Q11.2 1815,3575 1826,3586 RL1.4
NetD12_1: D12.A E2.K Q12.2 RL2.4 | length 1000.3
  Top Layer w19.68: E2.K@2462.5,3800 D12.A@2462.5,3895.18
  Top Layer w31.5: Q12.2 2600,3570 2626,3596 RL2.4
  Top Layer w39.37: D12.A@2457.68,3900 2616,3900
NetD13_1: D13.A E3.K Q13.2 RL3.4 | length 1000.3
  Top Layer w19.68: E3.K@3262.5,3800 D13.A@3262.5,3895.18
  Top Layer w31.5: Q13.2@3335,3570 3400,3570 3426,3596 RL3.4
  Top Layer w39.37: D13.A@3257.68,3900 3416,3900
NetD14_1: D14.A E4.K Q14.2 RL4.4 | length 1000.3
  Top Layer w19.68: E4.K@4062.5,3800 D14.A@4062.5,3895.18
  Top Layer w31.5: Q14.2 4200,3570 4226,3596 RL4.4
  Top Layer w39.37: D14.A@4057.68,3900 4216,3900
NetD15_1: D15.A E5.K Q15.2 RL5.4 | length 1000.3
  Top Layer w19.68: E5.K@4862.5,3800 D15.A@4862.5,3895.18
  Top Layer w31.5: Q15.2 5000,3570 5026,3596 RL5.4
  Top Layer w39.37: D15.A@4857.68,3900 5016,3900
NetD16_1: D16.A E6.K Q16.2 RL6.4 | length 1000.3
  Top Layer w19.68: E6.K@5662.5,3800 D16.A@5662.5,3895.18
  Top Layer w31.5: Q16.2 5800,3570 5826,3596 RL6.4
  Top Layer w39.37: D16.A@5657.68,3900 5816,3900
NetD17_1: D17.A E7.K Q17.2 RL7.4 | length 1000.3
  Top Layer w19.68: E7.K@6462.5,3800 D17.A@6462.5,3895.18
  Top Layer w31.5: Q17.2 6600,3570 6626,3596 RL7.4
  Top Layer w39.37: D17.A@6457.68,3900 6616,3900
NetD18_1: D18.A E8.K Q18.2 RL8.4 | length 1000.3
  Top Layer w19.68: E8.K@7262.5,3800 D18.A@7262.5,3895.18
  Top Layer w31.5: Q18.2 7400,3570 7426,3596 RL8.4
  Top Layer w39.37: D18.A@7257.68,3900 7416,3900
NetE1_A: E1.A Rrl13.1 | length 104
  Top Layer w39.37: Rrl13.1 E1.A
NetE2_A: E2.A Rrl23.1 | length 104
  Top Layer w19.68: Rrl23.1 E2.A@2387.5,3800
NetE3_A: E3.A Rrl33.1 | length 104
  Top Layer w19.68: Rrl33.1 E3.A@3187.5,3800
NetE4_A: E4.A Rrl43.1 | length 104
  Top Layer w19.68: Rrl43.1 E4.A@3987.5,3800
NetE5_A: E5.A Rrl53.1 | length 104
  Top Layer w19.68: Rrl53.1 E5.A@4787.5,3800
NetE6_A: E6.A Rrl63.1 | length 104
  Top Layer w19.68: Rrl63.1 E6.A@5587.5,3800
NetE7_A: E7.A Rrl73.1 | length 104
  Top Layer w19.68: Rrl73.1 E7.A@6387.5,3800
NetE8_A: E8.A Rrl83.1 | length 104
  Top Layer w19.68: Rrl83.1 E8.A@7187.5,3800
NetIN1_1: IN1.1 R01.1@3478,2161.37 | length 148
  Top Layer w19.68: R01.1@3478,2155.46 3564.54,2155.46 IN1.1
NetIN2_1: IN2.1 R03.1@3883,2151.37 | length 188.9
  Top Layer w19.68: R03.1@3883,2145.46 4024.54,2145.46 IN2.1
NetIN3_1: IN3.1 R05.1@4333,2151.37 | length 191.3
  Top Layer w19.68: R05.1@4333,2151.37 4468.63,2151.37 IN3.1
NetIN4_1: IN4.1 R07.1@4783,2176.37 | length 201.7
  Top Layer w19.68: R07.1@4783,2176.37 4893.63,2176.37 IN4.1
NetIN5_1: IN5.1 R09.1@5233,2176.37 | length 201.7
  Top Layer w19.68: R09.1@5233,2176.37 5343.63,2176.37 IN5.1
NetIN6_1: IN6.1 R11.1@5683,2176.37 | length 226.7
  Top Layer w19.68: R11.1@5683,2176.37 5818.63,2176.37 IN6.1
NetIN7_1: IN7.1 R13.1@6183,2176.37 | length 226.7
  Top Layer w19.68: R13.1@6183,2176.37 6318.63,2176.37 IN7.1
NetIN8_1: IN8.1 R15.1@6683,2176.37 | length 226.7
  Top Layer w19.68: R15.1@6683,2176.37 6818.63,2176.37 IN8.1
NetPW_2: PW.K R21.1@1360,2579.37 | length 174.4
  Top Layer w15: PW.K R21.1@1354.37,2585
NetQ11_1: Q11.1 Rrl11.2 Rrl12.2 | length 206.9
  Top Layer w19.68: Rrl11.2 1429.54,3613 Q11.1
NetQ12_1: Q12.1 Rrl21.2 Rrl22.2 | length 195.2
  Top Layer w19.68: Rrl21.2 2250.46,3608 Q12.1
NetQ13_1: Q13.1 Rrl31.2 Rrl32.2 | length 195.2
  Top Layer w19.68: Rrl31.2@3050,3608.46 3050.46,3608 Q13.1@3245,3608
NetQ14_1: Q14.1 Rrl41.2 Rrl42.2 | length 195.2
  Top Layer w19.68: Rrl41.2@3850,3608.46 3850.46,3608 Q14.1
NetQ15_1: Q15.1 Rl52.2 Rrl51.2 | length 195.2
  Top Layer w19.68: Rrl51.2@4650,3608.46 4650.46,3608 Q15.1
NetQ16_1: Q16.1 Rrl61.2 Rrl62.2 | length 195.2
  Top Layer w19.68: Rrl61.2@5450,3608.46 5450.46,3608 Q16.1
NetQ17_1: Q17.1 Rrl71.2 Rrl72.2 | length 195.2
  Top Layer w19.68: Rrl71.2@6250,3608.46 6250.46,3608 Q17.1
NetQ18_1: Q18.1 Rrl81.2 Rrl82.2 | length 195.2
  Top Layer w19.68: Rrl81.2@7050,3608.46 7050.46,3608 Q18.1
RELAY_1: Rrl11.1 U3.1 | length 3844.6
  Top Layer w12: v1(1390,3540) 1391.54,3541.54 Rrl11.1 ; v1(4839,3297) 4839,3300 4941.76,3197.24 U3.1 U3.1@5027.65,3202.35
  Bottom Layer w12: v1(1390,3540) 1380,3530 2050,3530 2150,3430 2593,3430 2663,3360 4776,3360 v1(4839,3297)
RELAY_2: Rrl21.1 U3.32 | length 3052.5
  Top Layer w12: v1(2200,3540) 2201.54,3541.54 Rrl21.1 ; v1(4851,3393) 4991.65,3252.35 U3.32
  Bottom Layer w12: v1(2200,3540) 2588,3540 2735,3393 v1(4851,3393)
RELAY_3: Rrl31.1 U3.28 | length 2441.8
  Top Layer w12: v1(3000,3530) 3006.54,3536.54 Rrl31.1 ; v1(5058,3438) 5062,3442 5113,3442 5208.75,3346.25 U3.28
  Bottom Layer w12: v1(3000,3530) 3092,3438 v1(5058,3438) v1@5058,3431
RELAY_4: Rrl41.1 U3.27 | length 1707.2
  Top Layer w12: v1(3800,3530) 3843.46,3530 Rrl41.1 ; v1(5171,3491) 5171,3490 5240.24,3420.76 U3.27
  Bottom Layer w12: v1(3800,3530) 3839,3491 v1(5171,3491)
RELAY_5: Rrl51.1 U3.26 | length 997.5
  Top Layer w12: v1(4590,3540) 4636.54,3540 Rrl51.1 ; v1(5232,3540) 5271.74,3500.26 U3.26
  Bottom Layer w12: v1(4590,3540) v1(5232,3540)
RELAY_6: Rrl61.1 U3.25 | length 387.2
  Top Layer w12: U3.25 5303.24,3348.24 v1(5312,3357) v1@5313.57,3355.43 ; v1(5390,3540) 5393.46,3536.54 Rrl61.1
  Bottom Layer w12: v1(5312,3357) 5312,3462 v1(5390,3540)
RELAY_7: Rrl71.1 U3.24 | length 1096.7
  Top Layer w12: U3.24 5358.35,3307.35 v1(5405,3354) ; v1(6200,3530) 6206.54,3536.54 Rrl71.1
  Bottom Layer w12: v1(5405,3354) 5581,3530 v1(6200,3530)
RELAY_8: Rrl81.1 U3.23 | length 1868.1
  Top Layer w12: U3.23 5411.74,3165.74 5686,3440 v1(5790,3440) ; v1(6990,3530) 6980,3540 7046.54,3540 Rrl81.1
  Bottom Layer w12: v1(5790,3440) 6900,3440 v1(6990,3530)
RST: ISP.3 U3.29 | length 902.4
  Top Layer w12: U3.29 5177.25,3192.75 v1(5223,3147)
  Bottom Layer w12: v1(5223,3147) 5652,3147 5698,3101 ISP.3
SCK: ISP.2 U3.17 | length 1040.5
  Top Layer w12: U3.17 5968.24,2976.76 6008,2937 6008,2890 6008,2812 5963,2767 5848,2767 ISP.2
VCC: C22.1 C34.1@5588,3056.57 C35.1@4883,3046.57 EX_CON.4 IN1.4 IN2.4 IN3.4 IN4.4 IN5.4 IN6.4 IN7.4 IN8.4 ISP.4 PW.A U2.3 U3.4 U3.6 U3.18 | length 11874.1
  Top Layer w12: C35.1@4889.81,3039.76 4953,3039.76 ; U3.4 4978.75,3102.75 4953,3077 4953,3039.76 ; U3.18 5191.74,3008.26 5160.24,3039.76 U3.6 4953,3039.76
  Top Layer w15: PW.A 1355,2695 1480,2820 1480,3160 1515,3195 U2.3
  Top Layer w19.68: U3.18 5539.69,3008.26 C34.1@5588,3056.57
  Top Layer w25: C22.1 4335,3150 v1(4475,3010) 4397.57,2932.57 3860,2932.57 3608,2680.57 IN1.4 ; v1(4785,3055) 4793.43,3046.57 C35.1@4883,3046.57
  Bottom Layer w15: ISP.4 5898,2544 5900,2542
  Bottom Layer w25: U2.3 2295,3195 C22.1 ; IN1.4 3608,2502 3648,2542 4058,2542 ; IN2.4 4058,2542 ; v1(4475,3010) 4740,3010 v1(4785,3055) ; IN3.4 4508,2542 ; IN4.4 4958,2532 4968,2542 ; IN5.4 5408,2542 ; IN6.4 5883,2527 ; IN7.4 6383,2537 6378,2542 ; IN8.4 6883,2527 ; EX_CON.4 6925,3025 6883,2983 6883,2527 ; 4058,2542 4508,2542 ; 4508,2542 4968,2542 ; 4968,2542 5408,2542 ; 5408,2542 5900,2542 6378,2542 ; 6378,2542 6868,2542 6883,2527
XTAL1: C33.1 U3.7 XT.1 | length 583.6
  Top Layer w12: C33.1 4669.54,2880.46 XT.1 4668,2952 4724.26,3008.26 U3.7
XTAL2: C32.1 U3.8 XT.2 | length 369.7
  Top Layer w12: C32.1 4868,2758.54 XT.2 4868,2947 4897.76,2976.76 U3.8
pads on no net: C31.0 C31.1@5483,3056.57 C31.1@5483,3127.43 C31.1@5483.01,3056.56 C31.1@5483.01,3127.43 C32.0 C33.0 C34.0 C34.1@5588,3056.57 C34.1@5588,3127.43 C34.1@5588.01,3056.56 C34.1@5588.01,3127.43 C35.0 C35.1@4883,3046.57 C35.1@4883,3117.43 C35.1@4883.01,3046.56 C35.1@4883.01,3117.43 Crl1.0 Crl1.1@1340.99,3656.57 Crl1.1@1340.99,3727.44 Crl1.1@1341,3656.57 Crl1.1@1341,3727.43 Crl2.0 Crl2.1@2139.99,3656.57 Crl2.1@2139.99,3727.44 Crl2.1@2140,3656.57 Crl2.1@2140,3727.43 Crl3.0 Crl3.1@2939.99,3656.57 Crl3.1@2939.99,3727.44 Crl3.1@2940,3656.57 Crl3.1@2940,3727.43 Crl4.0 Crl4.1@3749.99,3656.57 Crl4.1@3749.99,3727.44 Crl4.1@3750,3656.57 Crl4.1@3750,3727.43 Crl5.0 Crl5.1@4539.99,3656.57 Crl5.1@4539.99,3727.44 Crl5.1@4540,3656.57 Crl5.1@4540,3727.43 Crl6.0 Crl6.1@5349.99,3656.57 Crl6.1@5349.99,3727.44 Crl6.1@5350,3656.57 Crl6.1@5350,3727.43 Crl7.0 Crl7.1@6143.99,3656.57 Crl7.1@6143.99,3727.44 Crl7.1@6144,3656.57 Crl7.1@6144,3727.43 Crl8.0 Crl8.1@6943.99,3656.57 Crl8.1@6943.99,3727.44 Crl8.1@6944,3656.57 Crl8.1@6944,3727.43 D11.0 D12.0 D13.0 D14.0 D15.0 D16.0 D17.0 D18.0 E1.0 E2.0 E3.0 E4.0 E5.0 E6.0 E7.0 E8.0 F21.0 MOV1.0 MOV2.0 MOV3.0 MOV4.0 MOV5.0 MOV6.0 MOV7.0 MOV8.0 R01.0 R01.1@3477.99,2082.63 R01.1@3477.99,2161.37 R01.1@3478,2082.63 R01.1@3478,2161.37 R02.0 R02.1@3883,2372.63 R02.1@3883,2451.37 R02.1@3883.01,2372.63 R02.1@3883.01,2451.37 R03.0 R03.1@3882.99,2072.63 R03.1@3882.99,2151.37 R03.1@3883,2072.63 R03.1@3883,2151.37 R04.0 R04.1@4333,2372.63 R04.1@4333,2451.37 R04.1@4333.01,2372.63 R04.1@4333.01,2451.37 R05.0 R05.1@4332.99,2072.63 R05.1@4332.99,2151.37 R05.1@4333,2072.63 R05.1@4333,2151.37 R06.0 R06.1@4783,2372.63 R06.1@4783,2451.37 R06.1@4783.01,2372.63 R06.1@4783.01,2451.37 R07.0 R07.1@4782.99,2097.63 R07.1@4782.99,2176.37 R07.1@4783,2097.63 R07.1@4783,2176.37 R08.0 R08.1@5233,2372.63 R08.1@5233,2451.37 R08.1@5233.01,2372.63 R08.1@5233.01,2451.37 R09.0 R09.1@5232.99,2097.63 R09.1@5232.99,2176.37 R09.1@5233,2097.63 R09.1@5233,2176.37 R10.0 R10.1@5683,2372.63 R10.1@5683,2451.37 R10.1@5683.01,2372.63 R10.1@5683.01,2451.37 R11.0 R11.1@5682.99,2097.63 R11.1@5682.99,2176.37 R11.1@5683,2097.63 R11.1@5683,2176.37 R12.0 R12.1@6183,2372.63 R12.1@6183,2451.37 R12.1@6183.01,2372.63 R12.1@6183.01,2451.37 R13.0 R13.1@6182.99,2097.63 R13.1@6182.99,2176.37 R13.1@6183,2097.63 R13.1@6183,2176.37 R14.0 R14.1@6683,2372.63 R14.1@6683,2451.37 R14.1@6683.01,2372.63 R14.1@6683.01,2451.37 R15.0 R15.1@6682.99,2097.63 R15.1@6682.99,2176.37 R15.1@6683,2097.63 R15.1@6683,2176.37 R16.0 R16.1@7183,2372.63 R16.1@7183,2451.37 R16.1@7183.01,2372.63 R16.1@7183.01,2451.37 R21.0 R21.1@1359.99,2500.63 R21.1@1359.99,2579.37 R21.1@1360,2500.63 R21.1@1360,2579.37 Rl52.0 Rrl11.0 Rrl12.0 Rrl13.0 Rrl21.0 Rrl22.0 Rrl23.0 Rrl31.0 Rrl32.0 Rrl33.0 Rrl41.0 Rrl42.0 Rrl43.0 Rrl51.0 Rrl53.0 Rrl61.0 Rrl62.0 Rrl63.0 Rrl71.0 Rrl72.0 Rrl73.0 Rrl81.0 Rrl82.0 Rrl83.0

## Polygon pours and split planes (outlines as drawn)
GND on Top Layer "GND_L01_P004" (solid, remove dead copper, pour order 4): 984.25,1673.23 7874.02,1673.23 7874.02,3543.31 984.25,3543.31
GND on Bottom Layer "GND_L02_P006" (solid, remove dead copper, pour order 6): 7874.02,1673.23 7874.02,3543.31 984.25,3543.31 984.25,1673.23

## Keep-outs
Keep-Out Layer:
  lines w10: 984.25,1673.23 984.25,5413.39 7874.02,5413.39 7874.02,1673.23 984.25,1673.23 ; 1177.5,4315 1177.5,4365 1502.5,4365 1502.5,4015 1677.5,4015 1677.5,4365 2305,4365 2305,4015 2480,4015 2480,4365 3107.5,4365 3107.5,4015 3282.5,4015 3282.5,4365 3910,4365 3910,4015 4085,4015 4085,4365 4712.5,4365 4712.5,4015 4887.5,4015 4887.5,4365 5515,4365 5515,4015 5690,4015 5690,4365 6317.5,4365 6317.5,4015 6492.5,4015 6492.5,4365 6535,4365 7120,4365 7120,4015 7295,4015 7295,4365 7597.5,4365 7597.5,4315 7345,4315 7345,3965 7070,3965 7070,4315 6542.5,4315 6542.5,3965 6267.5,3965 6267.5,4315 5740,4315 5740,3965 5465,3965 5465,4315 4937.5,4315 4937.5,3965 4662.5,3965 4662.5,4315 4135,4315 4135,3965 3860,3965 3860,4315 3332.5,4315 3332.5,3965 3057.5,3965 3057.5,4315 2530,4315 2530,3965 2255,3965 2255,4315 1727.5,4315 1727.5,3965 1452.5,3965 1452.5,4315 1177.5,4315

## Other copper
Top Layer:
  pour cut-out: 6003.94,2952.76 6003.94,2657.48 5610.24,2657.48 5610.24,2952.76
  pour cut-out: 984.25,1673.23 1771.65,1673.23 1771.65,2854.33 984.25,2854.33
  pour cut-out: 7381.89,3444.88 7677.17,3444.88 7677.17,2854.33 7381.89,2854.33
  pour cut-out: 3346.46,1673.23 3346.46,2263.78 7185.04,2263.78 7185.04,1673.23
Bottom Layer:
  pour cut-out: 6003.94,2657.48 6003.94,2952.76 5610.24,2952.76 5610.24,2657.48
  pour cut-out: 1771.65,1673.23 1771.65,2854.33 984.25,2854.33 984.25,1673.23
  pour cut-out: 7381.89,3444.88 7677.17,3444.88 7677.17,2854.33 7381.89,2854.33
  pour cut-out: 3346.46,1673.23 3346.46,2263.78 7185.04,2263.78 7185.04,1673.23

## Text inside footprints (layer, text, board x,y; h text height)
ISP: Top Overlay "6" at 5618,2737 h50 r180; Top Overlay "3" at 5618,2837 h50 r180; Top Overlay "1" at 5978,2837 h50 r180; Top Overlay "4" at 5998,2737 h50 r180